# EAGLE board oneboard1 (EAGLE 7.5.0)
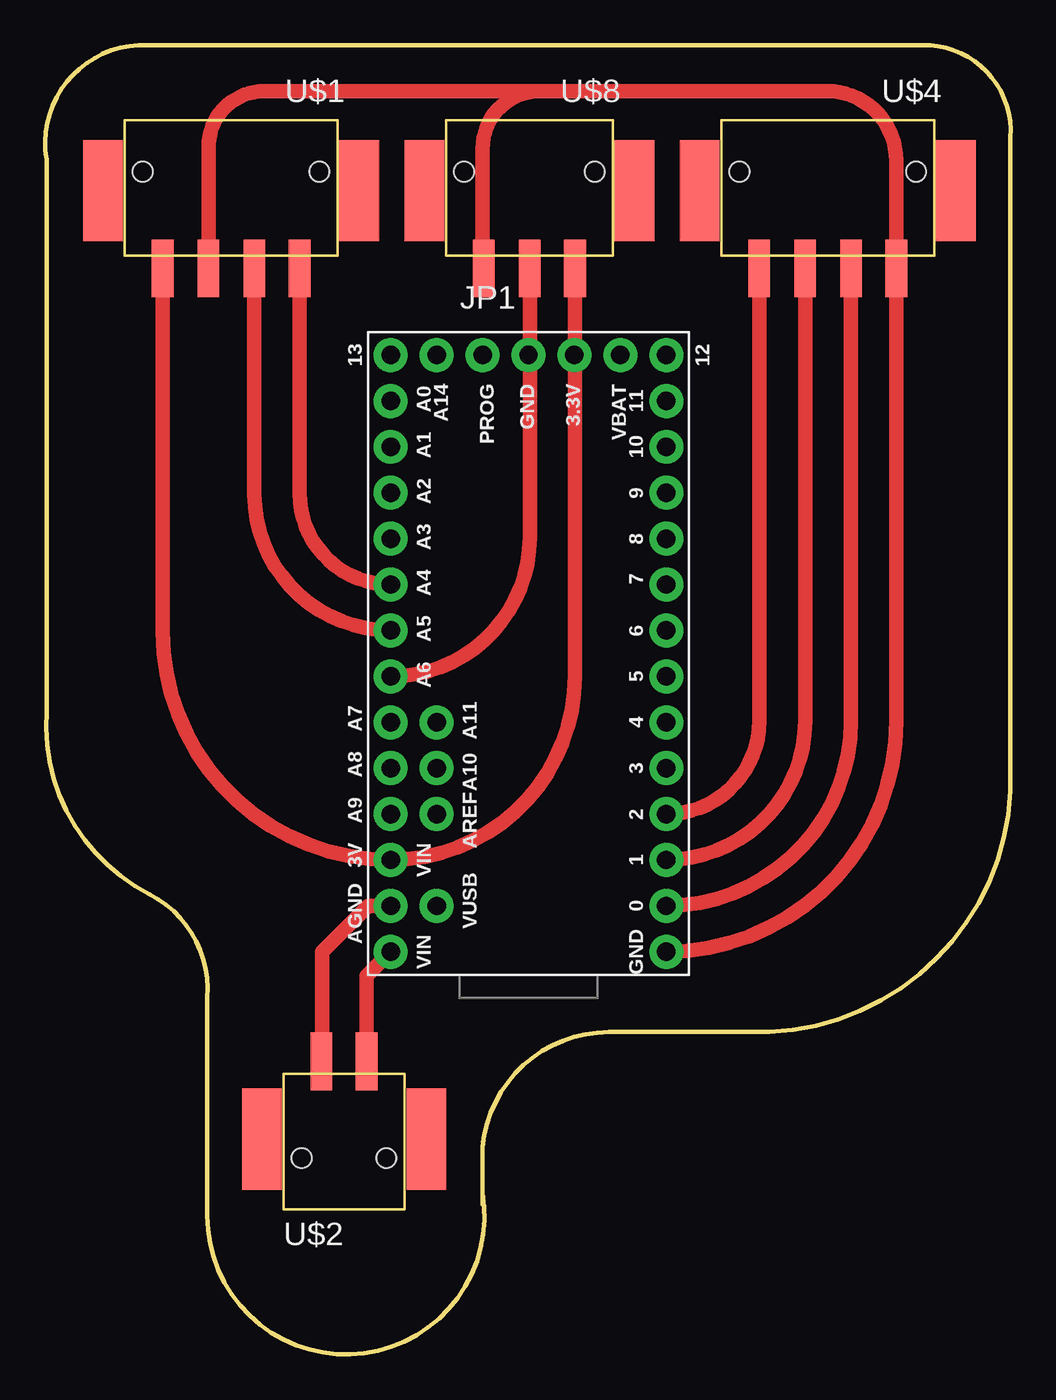
[diagram p0: board, top side]
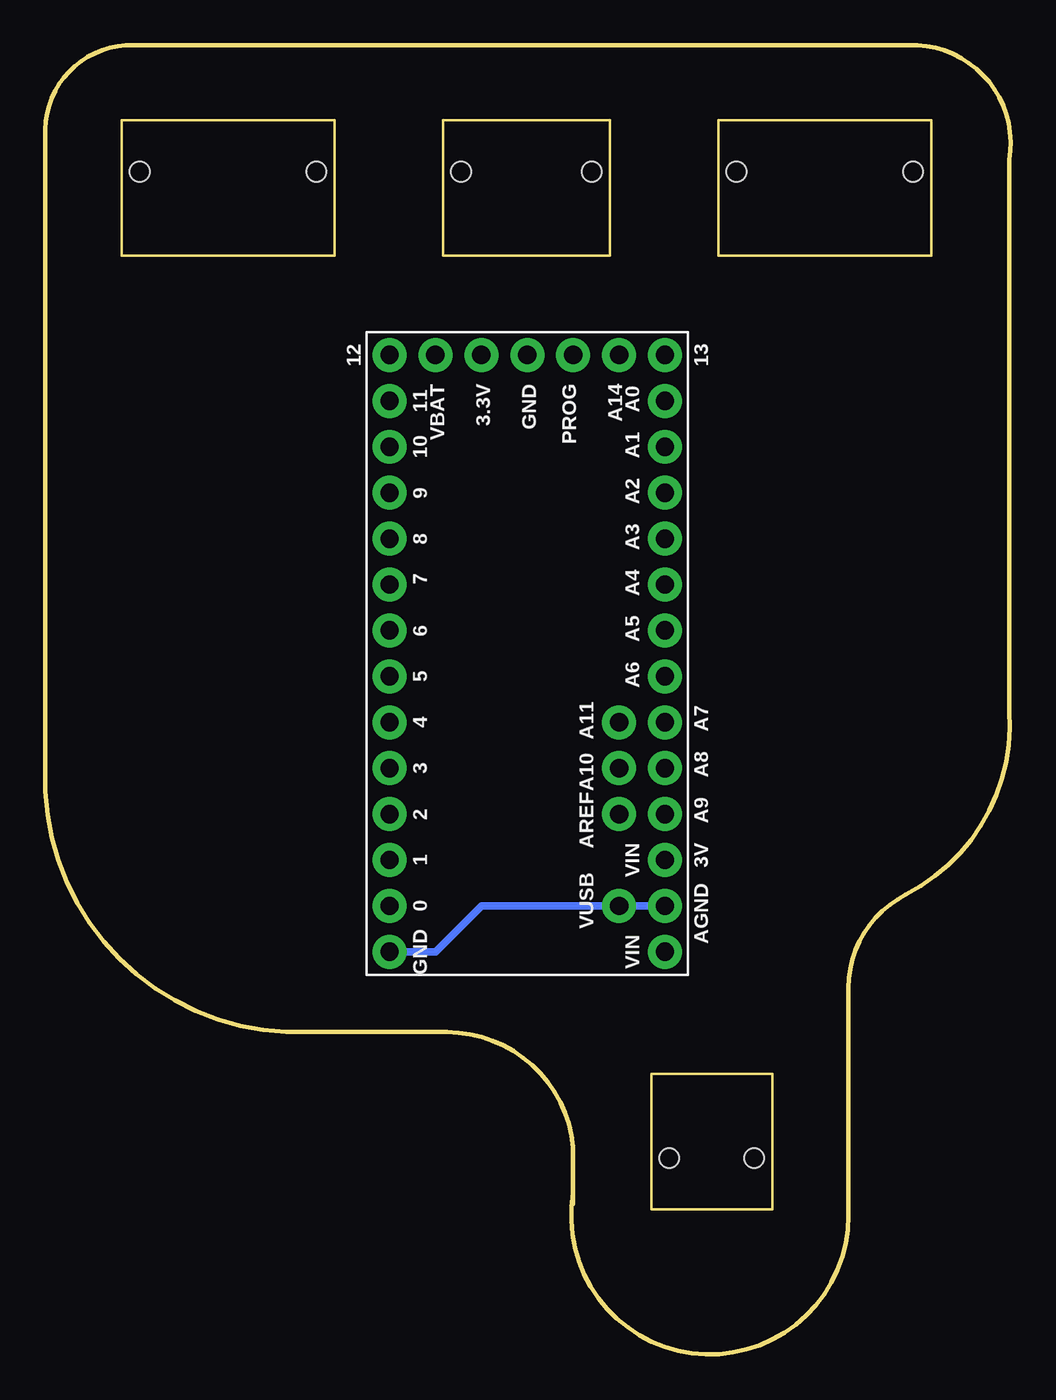
[diagram p1: board, bottom side, seen from below]

Size 53.43 x 72.44 mm. Coordinates in mm from the lower left corner, seen from the top.
Outline: 24.21,8.94 arc-190 8.97,7.67 8.97,19.73 arc67 5.79,25.45 arc-67 0.08,35.61 0.08,66.09 arc-97 5.16,72.44 48.97,72.44 arc-90 53.42,67.36 53.42,32.43 arc-90 40.08,17.83 31.19,17.83 arc85 24.21,11.48 24.21,8.3
Copper layers (1*16): Top 0.035mm / dielectric 1.5mm / Bottom 0.035mm
Design rules "default": minimum track width 10mil, minimum drill 24mil, track to track 8mil, track to pad 8mil, pad to pad 8mil, via to via 8mil, smd to smd 8mil, copper to edge 40mil, drill to drill 8mil, minimum pad ring 10mil, minimum via ring 8mil, stop-mask expansion 4mil, vias tented up to drill 0mil, thermal gap 10mil

## Footprints (pad centres in the part's own frame; a part is rotated, then mirrored left to right if it is on the bottom)
TEENSY-3.1 = drill 1.016 pad 1.88: 0 16.51,3.81; 1 16.51,6.35; 2 16.51,8.89; 3 16.51,11.43; 3.3V 11.43,34.29; 3V 1.27,6.35; 4 16.51,13.97; 5 16.51,16.51; 6 16.51,19.05; 7 16.51,21.59; 8 16.51,24.13; 9 16.51,26.67; 10 16.51,29.21; 11 16.51,31.75; 12 16.51,34.29; 13 1.27,34.29; 14 1.27,31.75; 15 1.27,29.21; 16 1.27,26.67; 17 1.27,24.13; 18 1.27,21.59; 19 1.27,19.05; 20 1.27,16.51; 21 1.27,13.97; 22 1.27,11.43; 23 1.27,8.89; A10 3.81,11.43; A11 3.81,13.97; A14/DAC 3.81,34.29; AGND 1.27,3.81; AREF 3.81,8.89; GND 8.89,34.29; GND1 16.51,1.27; PROG 6.35,34.29; VBAT 13.97,34.29; VIN 1.27,1.27; VUSB 3.81,3.81
M04_SMD_RIGHT = smd 2.2 x 5.6: B1 -7.14,1.07; B2 7.04,1.07 | smd 1.2 x 3.2: P1 -3.84,5.37; P2 -1.34,5.37; P3 1.2,5.37; P4 3.74,5.37 | hole 1.1: -4.94,0.02; 4.84,0.02
M02_SMD_RIGHT = smd 2.2 x 5.6: B1 -4.6,-0.2; B2 4.5,-0.2 | smd 1.2 x 3.2: P1 -1.3,4.1; P2 1.2,4.1 | hole 1.1: -2.4,-1.25; 2.3,-1.25
M03_SMD_RIGHT = smd 2.2 x 5.6: B1 -5.87,1.07; B2 5.77,1.07 | smd 1.2 x 3.2: P1 -2.57,5.37; P2 -0.07,5.37; P3 2.47,5.37 | hole 1.1: -3.67,0.02; 3.57,0.02

## Placement (x,y rotation side)
JP1  TEENSY-3.1SILK  [TEENSY-3.1]  17.86,21 0 top
U$1  PTSM0,4-HH-2,5-SMD-R44  [M04_SMD_RIGHT]  10.24,65.45 180 top
U$2  PTSM0,2-HH-2,5-SMD-R32  [M02_SMD_RIGHT]  16.59,12.11 0 top
U$4  PTSM0,4-HH-2,5-SMD-R44  [M04_SMD_RIGHT]  43.26,65.45 180 top
U$8  PTSM0,3-HH-2,5-SMD-R44  [M03_SMD_RIGHT]  26.75,65.45 180 top

## Library data of the parts
JP1 = SparkFun-Boards; SF_ID: DEV-12646
U$1 U$2 U$4 U$8 = PTSM_Connector

## Nets
GND: JP1.AGND JP1.GND1 U$1.P3 U$2.P1 U$4.P1 U$8.P3
N$1: JP1.1 U$4.P3
N$2: JP1.0 U$4.P2
N$4: JP1.2 U$4.P4
NEO: JP1.20 U$8.P2
SCL: JP1.19 U$1.P2
SDA: JP1.18 U$1.P1
VCC: JP1.3V U$1.P4 U$8.P1
VIN: JP1.VIN U$2.P2

## Tracks (layer width: path | path; a pad name or v marks a point on that pad's centre or on a via)
GND
  Top 0.813: JP1.AGND 17.86,24.81 15.32,22.27 15.32,16.24 U$2.P1 | JP1.GND1 arc90 47.1,35 U$4.P1 47.1,66.06 arc90 43.26,69.9 28.65,69.9 27.38,69.9 | 27.38,69.9 arc90 24.21,66.72 24.21,60.15 arc90 U$8.P3 | U$1.P3 9.04,66.79 arc-90 12.14,69.9 27.38,69.9
  Bottom 0.406: JP1.AGND 29.29,24.81 31.83,22.27 JP1.GND1
N$1
  Top 0.813: U$4.P3 42.06,35.04 arc-90 JP1.1
N$2
  Top 0.813: U$4.P2 44.6,35.04 arc-90 JP1.0
N$4
  Top 0.813: U$4.P4 39.52,35.04 arc-90 JP1.2
NEO
  Top 0.813: U$8.P2 26.82,45.2 arc-90 JP1.20
SCL
  Top 0.813: U$1.P2 11.58,47.6 arc90 JP1.19
SDA
  Top 0.813: U$1.P1 14.08,47.64 arc90 JP1.18
VCC
  Top 0.813: U$1.P4 6.5,39.98 arc90 JP1.3V arc90 29.32,37.54 U$8.P1
VIN
  Top 0.813: U$2.P2 17.79,20.93 JP1.VIN